# EAGLE board Touch_Shield-Panel-v12 (EAGLE 6.5.0)
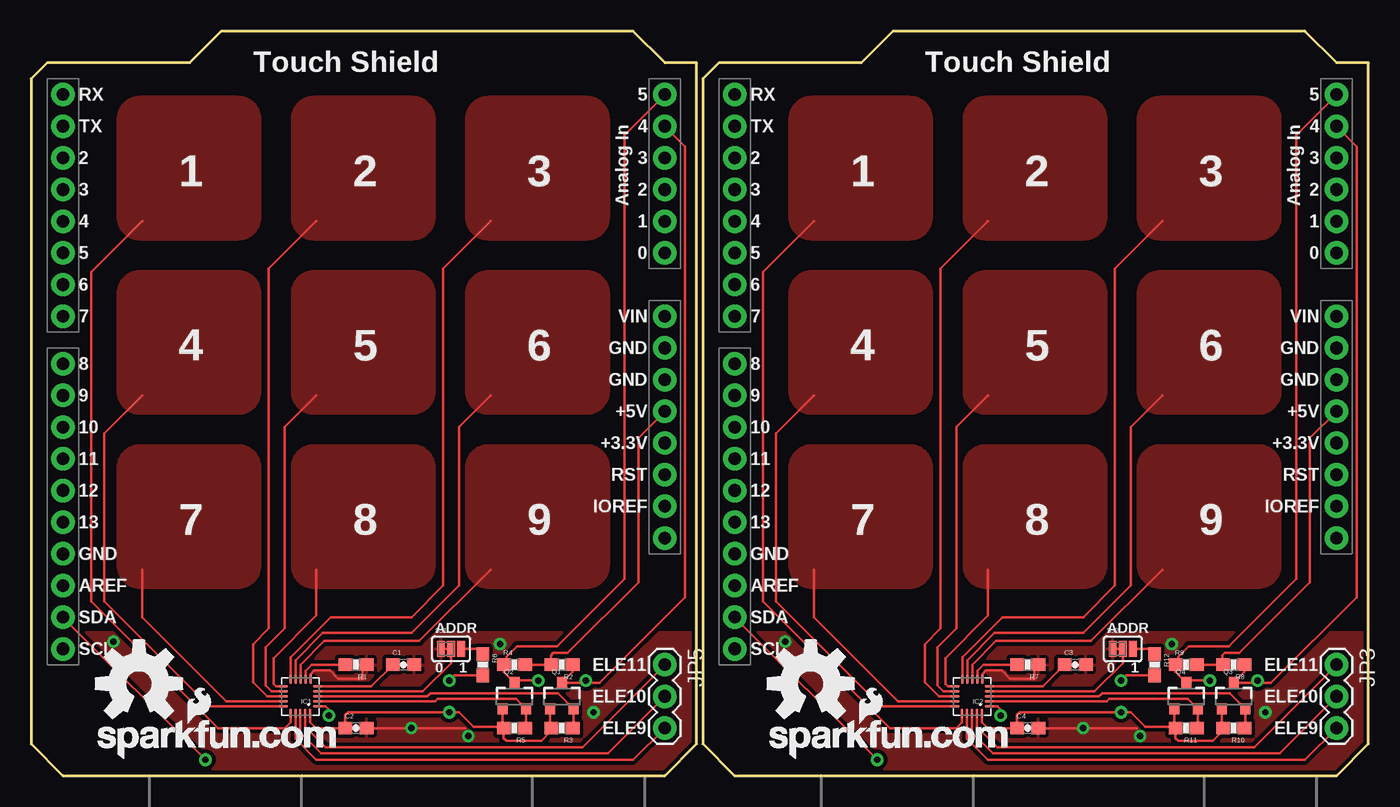
[diagram p0: board, top side]
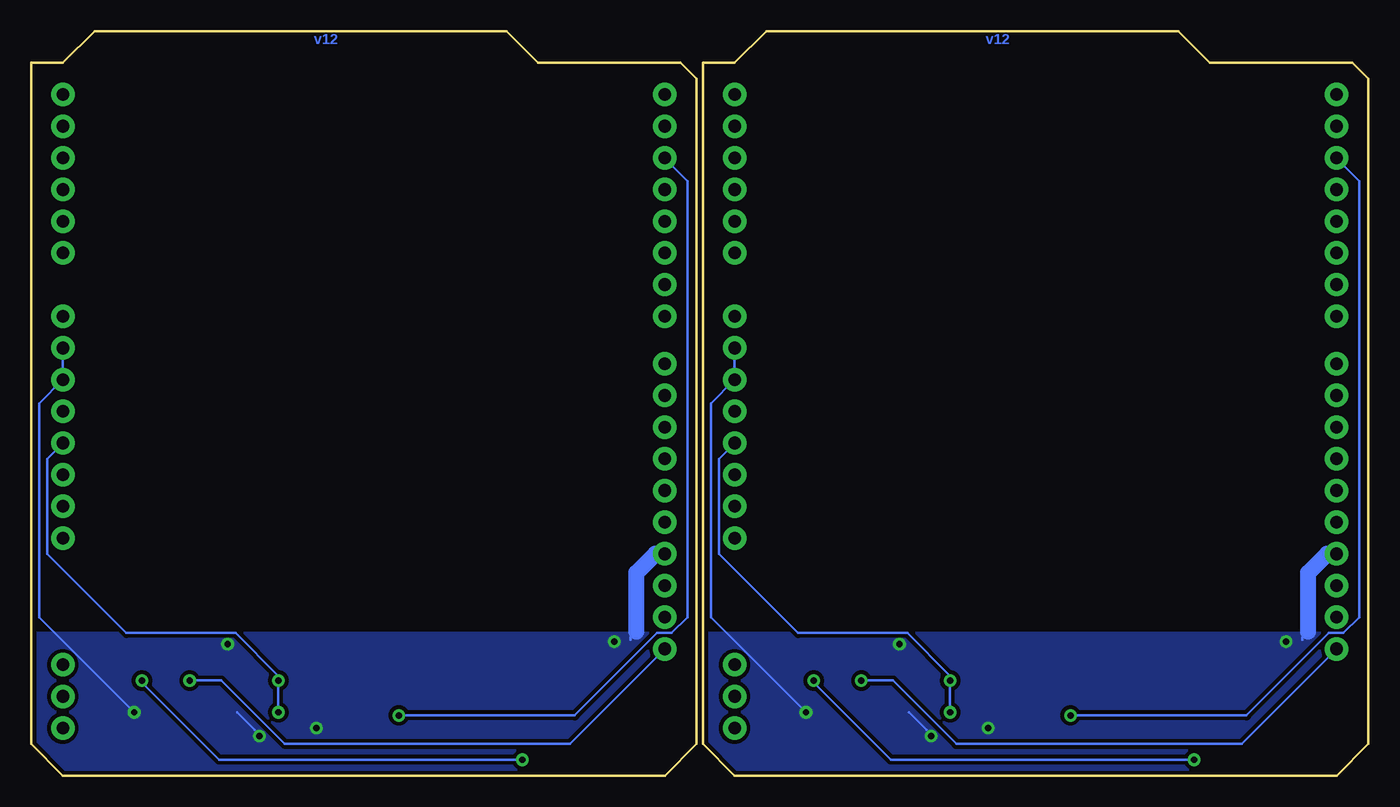
[diagram p1: board, bottom side, seen from below]

Size 107.19 x 59.69 mm. Coordinates in mm from the lower left corner, seen from the top.
Outline: 50.8,0 2.54,0 0,2.54 0,55.88 1.27,57.15 12.7,57.15 15.24,59.69 48.26,59.69 50.8,57.15 53.34,57.15 53.34,2.54 50.8,0
Outline: 104.65,0 56.39,0 53.85,2.54 53.85,55.88 55.12,57.15 66.55,57.15 69.09,59.69 102.11,59.69 104.65,57.15 107.19,57.15 107.19,2.54 104.65,0
Copper layers (1*16): Top 0.035mm / dielectric 1.5mm / Bottom 0.035mm
Design rules "SparkFun *": minimum track width 8mil, minimum drill 20mil, track to track 8mil, track to pad 8mil, pad to pad 8mil, via to via 8mil, smd to smd 8mil, copper to edge 8mil, drill to drill 8mil, minimum pad ring 12mil, minimum via ring 10mil, stop-mask expansion 4mil, vias tented up to drill 20mil, thermal gap 10mil
tRestrict: area 22.7,7.7 to 22.7,7.7; area 76.5,7.7 to 76.6,7.7

## Footprints (pad centres in the part's own frame; a part is rotated, then mirrored left to right if it is on the bottom)
0603-CAP = smd 1.1 x 1: 1 -0.85,0; 2 0.85,0
QFN-20-0.4MM-V2 = smd 0.75 x 0.195: 1 -1.367,0.8; 2 -1.367,0.4; 3 -1.367,0; 4 -1.367,-0.4; 5 -1.367,-0.8; 11 1.375,-0.8; 12 1.375,-0.4; 13 1.375,0; 14 1.375,0.4; 15 1.375,0.8 | smd 0.195 x 0.75: 6 -0.795,-1.372; 7 -0.395,-1.372; 8 0.005,-1.372; 9 0.405,-1.372; 10 0.805,-1.372; 16 0.81,1.372; 17 0.41,1.372; 18 0.01,1.372; 19 -0.39,1.372; 20 -0.79,1.372
1X03 = drill 1.016 pad 1.88: 1 0,0; 2 2.54,0; 3 5.08,0
SOT23-3 = smd 0.8 x 0.9: 1 -0.95,-1; 2 0.95,-1; 3 0,1.1
0603-RES = smd 1.1 x 1: 1 -0.85,0; 2 0.85,0
SJ_3_PASTE1&2 = smd 0.635 x 1.27: 1 -0.813,0; 2 0,0; 3 0.813,0
UNO_R3_SHIELD = drill 1.016 pad 1.88: 3.3V 50.8,26.67; 5V 50.8,29.21; A0 50.8,41.91; A1 50.8,44.45; A2 50.8,46.99; A3 50.8,49.53; A4 50.8,52.07; A5 50.8,54.61; AREF 2.54,15.24; D2 2.54,49.53; D3 2.54,46.99; D4 2.54,44.45; D5 2.54,41.91; D6 2.54,39.37; D7 2.54,36.83; D8 2.54,33.02; D9 2.54,30.48; D10 2.54,27.94; D11 2.54,25.4; D12 2.54,22.86; D13 2.54,20.32; GND@0 50.8,31.75; GND@1 50.8,34.29; GND@2 2.54,17.78; IOREF 50.8,21.59; NC 50.8,19.05; RES 50.8,24.13; RX 2.54,54.61; SCL 2.54,10.16; SDA 2.54,12.7; TX 2.54,52.07; VIN 50.8,36.83

## Placement (x,y rotation side)
C1  0.1uF  [0603-CAP]  29.84,8.89 0 top
C2  0.1uF  [0603-CAP]  26.04,3.81 0 top
C3  0.1uF  [0603-CAP]  83.69,8.89 0 top
C4  0.1uF  [0603-CAP]  79.88,3.81 0 top
IC1  MPR121  [QFN-20-0.4MM-V2]  21.59,6.35 180 top
IC2  MPR121  [QFN-20-0.4MM-V2]  75.44,6.35 180 top
JP1  LOGO-SFENEW  [SFE-NEW-WEBLOGO]  5.33,1.32 0 top
JP2  LOGO-SFENEW  [SFE-NEW-WEBLOGO]  59.18,1.32 0 top
JP3  extra  [1X03]  104.65,8.89 270 top
JP5  extra  [1X03]  50.8,8.89 270 top
Q1  BSS138  [SOT23-3]  42.55,6.35 0 top
Q2  BSS138  [SOT23-3]  38.73,6.35 0 top
Q3  BSS138  [SOT23-3]  96.39,6.35 0 top
Q4  BSS138  [SOT23-3]  92.58,6.35 0 top
R1  75k  [0603-RES]  26.04,8.89 180 top
R2  10k  [0603-RES]  42.55,8.89 180 top
R3  10k  [0603-RES]  42.55,3.81 180 top
R4  10k  [0603-RES]  38.73,8.89 0 top
R5  10k  [0603-RES]  38.73,3.81 180 top
R6  10K  [0603-RES]  36.2,8.89 270 top
R7  75k  [0603-RES]  79.88,8.89 180 top
R8  10k  [0603-RES]  96.39,8.89 180 top
R9  10k  [0603-RES]  92.58,8.89 0 top
R10  10k  [0603-RES]  96.39,3.81 180 top
R11  10k  [0603-RES]  92.58,3.81 180 top
R12  10K  [0603-RES]  90.04,8.89 270 top
SJ1  [SJ_3_PASTE1&2]  33.66,10.16 0 top
SJ2  [SJ_3_PASTE1&2]  87.5,10.16 0 top
U1  ARDUINO_R3_SHIELD  [UNO_R3_SHIELD]  0,0 0 top
U2  ARDUINO_R3_SHIELD  [UNO_R3_SHIELD]  53.85,0 0 top
U$1  OSHW-LOGOL  [OSHW-LOGO-L]  62.48,7.37 0 top
U$5  OSHW-LOGOL  [OSHW-LOGO-L]  8.64,7.37 0 top

## Library data of the parts
C1-C4 JP1-JP3 JP5 Q1-Q4 R1 R7 = SparkFun
IC1 IC2 = SparkFun-Sensors
R2-R6 R8-R12 = SparkFun-Resistors; PROD_ID: RES-00824
SJ1 SJ2 = SparkFun-Passives
U1 U2 = SparkFun-Boards
U$1 U$5 = SparkFun-Aesthetics

## Nets
3.3V: C2.1 IC1.20 Q1.1 Q2.1 R3.2 R5.2 R6.2 U1.3.3V
3.3V1: C4.1 IC2.20 Q3.1 Q4.1 R10.2 R11.2 R12.2 U2.3.3V
5V: R2.2 R4.2 U1.5V
5V1: R8.2 R9.2 U2.5V
*IRQ: IC1.1 U1.D2
*IRQ1: IC2.1 U2.D2
A0: U1.A0
A1: U1.A1
A2: U1.A2
A3: U1.A3
A4: U2.A0
A5: U2.A1
A6: U2.A2
A7: U2.A3
AREF: U1.AREF
AREF1: U2.AREF
D1: U2.D3
D2: U2.D4
D3: U1.D3
D4: U1.D4
D5: U1.D5
D6: U1.D6
D7: U1.D7
D8: U1.D8
D9: U1.D9
D10: U1.D10
D11: U1.D11
D12: U1.D12
D13: U1.D13
D14: U2.D5
D15: U2.D6
D16: U2.D7
D17: U2.D8
D18: U2.D9
D19: U2.D10
D20: U2.D11
D21: U2.D12
D22: U2.D13
ELE1: IC2.19 JP3.1
ELE2: IC2.18 JP3.2
ELE3: IC2.17 JP3.3
ELE9: IC1.17 JP5.3
ELE10: IC1.18 JP5.2
ELE11: IC1.19 JP5.1
GND: C1.2 C2.2 IC1.6 R1.1 SJ1.1 U1.GND@0 U1.GND@1 U1.GND@2
GND1: C3.2 C4.2 IC2.6 R7.1 SJ2.1 U2.GND@0 U2.GND@1 U2.GND@2
IOREF: U1.IOREF
IOREF1: U2.IOREF
N$1: IC1.4 SJ1.2
N$2: R6.1 SJ1.3
N$3: IC2.4 SJ2.2
N$4: R12.1 SJ2.3
PAD1: IC1.16
PAD2: IC1.13
PAD3: IC1.10
PAD4: IC1.15
PAD5: IC1.12
PAD6: IC1.9
PAD7: IC1.14
PAD8: IC1.11
PAD9: IC1.8
PAD10: IC2.16
PAD11: IC2.15
PAD12: IC2.11
PAD13: IC2.14
PAD14: IC2.13
PAD15: IC2.12
PAD16: IC2.8
PAD17: IC2.9
PAD18: IC2.10
RESET: U1.RES
RESET1: U2.RES
REXT: IC1.7 R1.2
REXT1: IC2.7 R7.2
RX: U1.RX
RX1: U2.RX
SCL_H: Q2.3 R4.1 U1.A5 U1.SCL
SCL_H1: Q4.3 R9.1 U2.A5 U2.SCL
SCL_L: IC1.2 Q2.2 R5.1
SCL_L1: IC2.2 Q4.2 R11.1
SDA_H: Q1.3 R2.1 U1.A4 U1.SDA
SDA_H1: Q3.3 R8.1 U2.A4 U2.SDA
SDA_L: IC1.3 Q1.2 R3.1
SDA_L1: IC2.3 Q3.2 R10.1
TX: U1.TX
TX1: U2.TX
VIN: U1.VIN
VIN1: U2.VIN
VREG: C1.1 IC1.5
VREG1: C3.1 IC2.5

## Tracks (layer width: path | path; a pad name or v marks a point on that pad's centre or on a via)
3.3V  (via drill 0.51)
  Top 0.203: 38.1,3.81 R5.2 | Q2.1 37.78,3.91 | 37.78,3.91 R5.2 | Q1.1 41.59,3.91 | 41.59,3.91 R3.2 | IC1.20 22.38,4.29 22.86,3.81 C2.1 25.18,4.87 25.4,5.08 v33.53,5.08 34.29,5.08 35.46,3.91 37.78,3.91 | R6.2 33.95,8.04 v33.53,7.62 | 41.59,3.91 41.59,3.5 40.89,2.79 38.1,2.79 37.88,3.01 R5.2
  Bottom 0.203: U1.3.3V 52.07,25.4 52.07,17.78 45.72,11.43 36.96,11.43 33.53,8 v33.53,7.62 v33.53,5.08
3.3V1  (via drill 0.51)
  Top 0.203: 91.95,3.81 R11.2 | Q4.1 91.63,3.91 | 91.63,3.91 R11.2 | Q3.1 95.44,3.91 | 95.44,3.91 R10.2 | IC2.20 76.23,4.29 76.71,3.81 C4.1 79.03,4.87 79.25,5.08 v87.38,5.08 88.14,5.08 89.31,3.91 91.63,3.91 | R12.2 87.8,8.04 v87.38,7.62 | 95.44,3.91 95.44,3.5 94.74,2.79 91.95,2.79 91.73,3.01 R11.2
  Bottom 0.203: U2.3.3V 105.92,25.4 105.92,17.78 99.57,11.43 90.81,11.43 87.38,8 v87.38,7.62 v87.38,5.08
5V
  Top 0.203: R4.2 R2.2 41.66,8.93 41.66,9.65 41.83,9.83 43,9.83 48.67,15.49 48.67,27.08 U1.5V
5V1
  Top 0.203: R9.2 R8.2 95.5,8.93 95.5,9.65 95.68,9.83 96.85,9.83 102.51,15.49 102.51,27.08 U2.5V
*IRQ  (via drill 0.51)
  Top 0.203: IC1.1 23.6,5.55 23.96,5.18 23.96,4.92 v23.88,4.83
  Bottom 0.203: U1.D2 2.54,49.45 0.74,47.65 0.74,12.7 2.01,11.43 3.17,11.43 9.78,4.83 v23.88,4.83
*IRQ1  (via drill 0.51)
  Top 0.203: IC2.1 77.44,5.55 77.81,5.18 77.81,4.92 v77.72,4.83
  Bottom 0.203: U2.D2 56.39,49.45 54.59,47.65 54.59,12.7 55.85,11.43 57.02,11.43 63.63,4.83 v77.72,4.83
ELE1
  Top 0.203: JP3.1 98.04,2.29 77.47,2.29 75.83,3.93 IC2.19
ELE2
  Top 0.203: JP3.2 100.08,1.78 77.09,1.78 75.43,3.44 IC2.18
ELE3
  Top 0.203: JP3.3 102.11,1.27 76.71,1.27 75.03,2.95 IC2.17
ELE9
  Top 0.203: JP5.3 48.26,1.27 22.86,1.27 21.18,2.95 IC1.17
ELE10
  Top 0.203: JP5.2 46.23,1.78 23.24,1.78 21.58,3.44 IC1.18
ELE11
  Top 0.203: JP5.1 44.2,2.29 23.62,2.29 21.98,3.93 IC1.19
GND  (via drill 0.51)
  Top 0.203: IC1.6 22.39,8.14 22.67,8.42 23.96,8.42 24.61,7.77 26.56,7.77 26.56,8.56 R1.1 | C2.2 34.8,3.81 | SJ1.1 33.66,10.16
  Bottom 0.203: 5.3,10.87 5.3,11.09 4.83,11.56 | 35.43,3.68 36.83,5.08 | U1.GND@1 U1.GND@0 52.7,29.84 52.7,12.7 v45.09,5.08
  Bottom 1.27: U1.GND@2 3.3,17.78 4.83,16.26 4.83,11.56
  other vias: 6.6,10.74 30.48,3.81 37.59,10.54 35.05,3.17
  pour Bottom (isolate 0.305): 0,0 53.34,0 53.34,11.43 0,11.43
  pour Top (isolate 0.305): 0,11.43 0,0 53.34,0 53.34,11.43
GND1  (via drill 0.51)
  Top 0.203: IC2.6 76.23,8.14 76.52,8.42 77.81,8.42 78.46,7.77 80.4,7.77 80.4,8.56 R7.1 | C4.2 88.65,3.81 | SJ2.1 87.5,10.16
  Bottom 0.203: 59.14,10.87 59.14,11.09 58.67,11.56 | 89.28,3.68 90.68,5.08 | U2.GND@1 U2.GND@0 106.55,29.84 106.55,12.7 v98.93,5.08
  Bottom 1.27: U2.GND@2 57.15,17.78 58.67,16.26 58.67,11.56
  other vias: 60.45,10.74 84.33,3.81 91.44,10.54 88.9,3.17
  pour Bottom (isolate 0.305): 53.85,0 107.19,0 107.19,11.43 53.85,11.43
  pour Top (isolate 0.305): 53.85,11.43 53.85,0 107.19,0 107.19,11.43
N$1
  Top 0.203: IC1.4 31.39,6.75 33.66,9.02 SJ1.2
N$2
  Top 0.203: SJ1.3 35.77,10.16 R6.1
N$3
  Top 0.203: IC2.4 85.24,6.75 87.5,9.02 SJ2.2
N$4
  Top 0.203: SJ2.3 89.62,10.16 R12.1
PAD1
  Top 0.203: 8.89,44.45 4.83,40.39 4.83,13.97 14.99,3.81 20.32,3.81 20.78,4.27 IC1.16
  pour Top (isolate 0.305): 6.93,44.79 arc90 8.73,42.99 16.57,42.99 arc90 18.36,44.79 18.36,52.63 arc90 16.57,54.42 8.73,54.42 arc90 6.93,52.63
PAD2
  Top 0.203: 22.86,44.45 19.05,40.64 19.05,11.81 17.78,10.54 17.78,7.49 18.92,6.35 IC1.13
  pour Top (isolate 0.305): 20.9,44.79 arc90 22.7,42.99 30.54,42.99 arc90 32.33,44.79 32.33,52.63 arc90 30.54,54.42 22.7,54.42 arc90 20.9,52.63
PAD3
  Top 0.203: 36.83,44.45 33.02,40.64 33.02,15.24 30.48,12.7 24,12.7 20.79,9.48 IC1.10
  pour Top (isolate 0.305): 34.87,44.79 arc90 36.67,42.99 44.51,42.99 arc90 46.3,44.79 46.3,52.63 arc90 44.51,54.42 36.67,54.42 arc90 34.87,52.63
PAD4
  Top 0.203: 8.89,30.48 5.84,27.43 5.84,13.97 14.26,5.55 IC1.15
  pour Top (isolate 0.305): 6.93,30.82 arc90 8.73,29.02 16.57,29.02 arc90 18.36,30.82 18.36,38.66 arc90 16.57,40.45 8.73,40.45 arc90 6.93,38.66
PAD5
  Top 0.203: 22.86,30.48 20.32,27.94 20.32,11.82 18.8,10.3 18.8,7.24 19.29,6.75 IC1.12
  pour Top (isolate 0.305): 20.9,30.82 arc90 22.7,29.02 30.54,29.02 arc90 32.33,30.82 32.33,38.66 arc90 30.54,40.45 22.7,40.45 arc90 20.9,38.66
PAD6
  Top 0.203: 36.83,30.48 34.29,27.94 34.29,15.24 30.48,11.43 23.37,11.43 21.18,9.25 IC1.9
  pour Top (isolate 0.305): 34.87,30.82 arc90 36.67,29.02 44.51,29.02 arc90 46.3,30.82 46.3,38.66 arc90 44.51,40.45 36.67,40.45 arc90 34.87,38.66
PAD7
  Top 0.203: 8.89,16.51 8.89,15.24 8.89,12.7 15.64,5.95 IC1.14
  pour Top (isolate 0.305): 6.93,16.85 arc90 8.73,15.05 16.57,15.05 arc90 18.36,16.85 18.36,24.69 arc90 16.57,26.48 8.73,26.48 arc90 6.93,24.69
PAD8
  Top 0.203: 22.86,16.51 22.86,12.84 19.43,9.41 19.43,7.37 19.65,7.15 IC1.11
  pour Top (isolate 0.305): 20.9,16.85 arc90 22.7,15.05 30.54,15.05 arc90 32.33,16.85 32.33,24.69 arc90 30.54,26.48 22.7,26.48 arc90 20.9,24.69
PAD9
  Top 0.203: IC1.8 21.59,8.88 23.5,10.79 31.11,10.79 36.83,16.51
  pour Top (isolate 0.305): 34.87,16.85 arc90 36.67,15.05 44.51,15.05 arc90 46.3,16.85 46.3,24.69 arc90 44.51,26.48 36.67,26.48 arc90 34.87,24.69
PAD10
  Top 0.203: 62.74,44.45 58.67,40.39 58.67,13.97 68.83,3.81 74.17,3.81 74.63,4.27 IC2.16
  pour Top (isolate 0.305): 60.78,44.79 arc90 62.58,42.99 70.42,42.99 arc90 72.21,44.79 72.21,52.63 arc90 70.42,54.42 62.58,54.42 arc90 60.78,52.63
PAD11
  Top 0.203: 62.74,30.48 59.69,27.43 59.69,13.97 68.11,5.55 IC2.15
  pour Top (isolate 0.305): 60.78,30.82 arc90 62.58,29.02 70.42,29.02 arc90 72.21,30.82 72.21,38.66 arc90 70.42,40.45 62.58,40.45 arc90 60.78,38.66
PAD12
  Top 0.203: 76.71,16.51 76.71,12.84 73.28,9.41 73.28,7.37 73.5,7.15 IC2.11
  pour Top (isolate 0.305): 74.75,16.85 arc90 76.55,15.05 84.39,15.05 arc90 86.18,16.85 86.18,24.69 arc90 84.39,26.48 76.55,26.48 arc90 74.75,24.69
PAD13
  Top 0.203: 62.74,16.51 62.74,15.24 62.74,12.7 69.49,5.95 IC2.14
  pour Top (isolate 0.305): 60.78,16.85 arc90 62.58,15.05 70.42,15.05 arc90 72.21,16.85 72.21,24.69 arc90 70.42,26.48 62.58,26.48 arc90 60.78,24.69
PAD14
  Top 0.203: 76.71,44.45 72.9,40.64 72.9,11.81 71.63,10.54 71.63,7.49 72.77,6.35 IC2.13
  pour Top (isolate 0.305): 74.75,44.79 arc90 76.55,42.99 84.39,42.99 arc90 86.18,44.79 86.18,52.63 arc90 84.39,54.42 76.55,54.42 arc90 74.75,52.63
PAD15
  Top 0.203: 76.71,30.48 74.17,27.94 74.17,11.82 72.64,10.3 72.64,7.24 73.13,6.75 IC2.12
  pour Top (isolate 0.305): 74.75,30.82 arc90 76.55,29.02 84.39,29.02 arc90 86.18,30.82 86.18,38.66 arc90 84.39,40.45 76.55,40.45 arc90 74.75,38.66
PAD16
  Top 0.203: IC2.8 75.43,8.88 77.34,10.79 84.96,10.79 90.68,16.51
  pour Top (isolate 0.305): 88.72,16.85 arc90 90.52,15.05 98.36,15.05 arc90 100.15,16.85 100.15,24.69 arc90 98.36,26.48 90.52,26.48 arc90 88.72,24.69
PAD17
  Top 0.203: 90.68,30.48 88.14,27.94 88.14,15.24 84.33,11.43 77.22,11.43 75.03,9.25 IC2.9
  pour Top (isolate 0.305): 88.72,30.82 arc90 90.52,29.02 98.36,29.02 arc90 100.15,30.82 100.15,38.66 arc90 98.36,40.45 90.52,40.45 arc90 88.72,38.66
PAD18
  Top 0.203: 90.68,44.45 86.87,40.64 86.87,15.24 84.33,12.7 77.85,12.7 74.63,9.48 IC2.10
  pour Top (isolate 0.305): 88.72,44.79 arc90 90.52,42.99 98.36,42.99 arc90 100.15,44.79 100.15,52.63 arc90 98.36,54.42 90.52,54.42 arc90 88.72,52.63
REXT
  Top 0.203: R1.2 22.48,8.89 21.98,8.4 IC1.7
REXT1
  Top 0.203: R7.2 76.33,8.89 75.83,8.4 IC2.7
SCL_H  (via drill 0.51)
  Top 0.203: U1.A5 47.55,51.36 47.55,15.77 42.14,10.36 38.94,10.36 38.1,9.53 38.1,9.11 R4.1 37.88,8.3 Q2.3 38.91,7.62 v40.64,7.62
  Bottom 0.203: v40.64,7.62 38.1,7.62 33.02,2.54 10.16,2.54 U1.SCL
SCL_H1  (via drill 0.51)
  Top 0.203: U2.A5 101.4,51.36 101.4,15.77 95.99,10.36 92.79,10.36 91.95,9.53 91.95,9.11 R9.1 91.73,8.3 Q4.3 92.75,7.62 v94.49,7.62
  Bottom 0.203: v94.49,7.62 91.95,7.62 86.87,2.54 64.01,2.54 U2.SCL
SCL_L
  Top 0.203: IC1.2 32.37,5.95 32.59,6.17 38.86,6.17 Q2.2 39.69,3.91 R5.1
SCL_L1
  Top 0.203: IC2.2 86.21,5.95 86.44,6.17 92.71,6.17 Q4.2 93.53,3.91 R11.1
SDA_H  (via drill 0.51)
  Top 0.203: U1.A4 50.8,52.05 52.4,50.44 52.4,14.3 45.54,7.44 44.45,7.44 | 43.19,7.44 44.45,7.44 | U1.SDA v13.97,1.27 | 44.45,7.44 v44.45,7.62 44.28,7.45 Q1.3 43.4,8.3 R2.1
  Bottom 0.203: v13.97,1.27 38.28,1.27 44.45,7.44 v44.45,7.62
SDA_H1  (via drill 0.51)
  Top 0.203: U2.A4 104.65,52.05 106.25,50.44 106.25,14.3 99.39,7.44 98.3,7.44 | 97.04,7.44 98.3,7.44 | U2.SDA v67.82,1.27 | 98.3,7.44 v98.3,7.62 98.13,7.45 Q3.3 97.24,8.3 R8.1
  Bottom 0.203: v67.82,1.27 92.13,1.27 98.3,7.44 v98.3,7.62
SDA_L
  Top 0.203: IC1.3 31.75,6.35 32,6.6 42.24,6.6 Q1.2 43.49,3.91 R3.1
SDA_L1
  Top 0.203: IC2.3 85.6,6.35 85.85,6.6 96.09,6.6 Q3.2 97.34,3.91 R10.1
VREG
  Top 0.203: IC1.5 27.25,7.15 C1.1
VREG1
  Top 0.203: IC2.5 81.1,7.15 C3.1

## Text on the board
Bottom: v12 | v12
tPlace: Touch Shield | Touch Shield | 1 | 2 | 3 | 1 | 2 | 3 | 4 | 5 | 6 | 4 | 5 | 6 | 7 | 8 | 9 | 7 | 8 | 9 | ADDR | ADDR | ELE11 | ELE11 | 0 | 1 | 0 | 1 | ELE10 | ELE10 | ELE9 | ELE9